# Altium PCB Capstone.PcbDoc
Units mil, origin at the board's own origin, x right, y up, seen from the top; angles counter-clockwise.
Board outline 2565 x 2285 mil, 4 copper layers (Top Layer 1, GND, POWER, Bottom Layer 1), stack 23.756 mil thick; 47 components, 42 nets, 229 pads, 149 vias.
Unrouted connection lines stored in the file: 1.
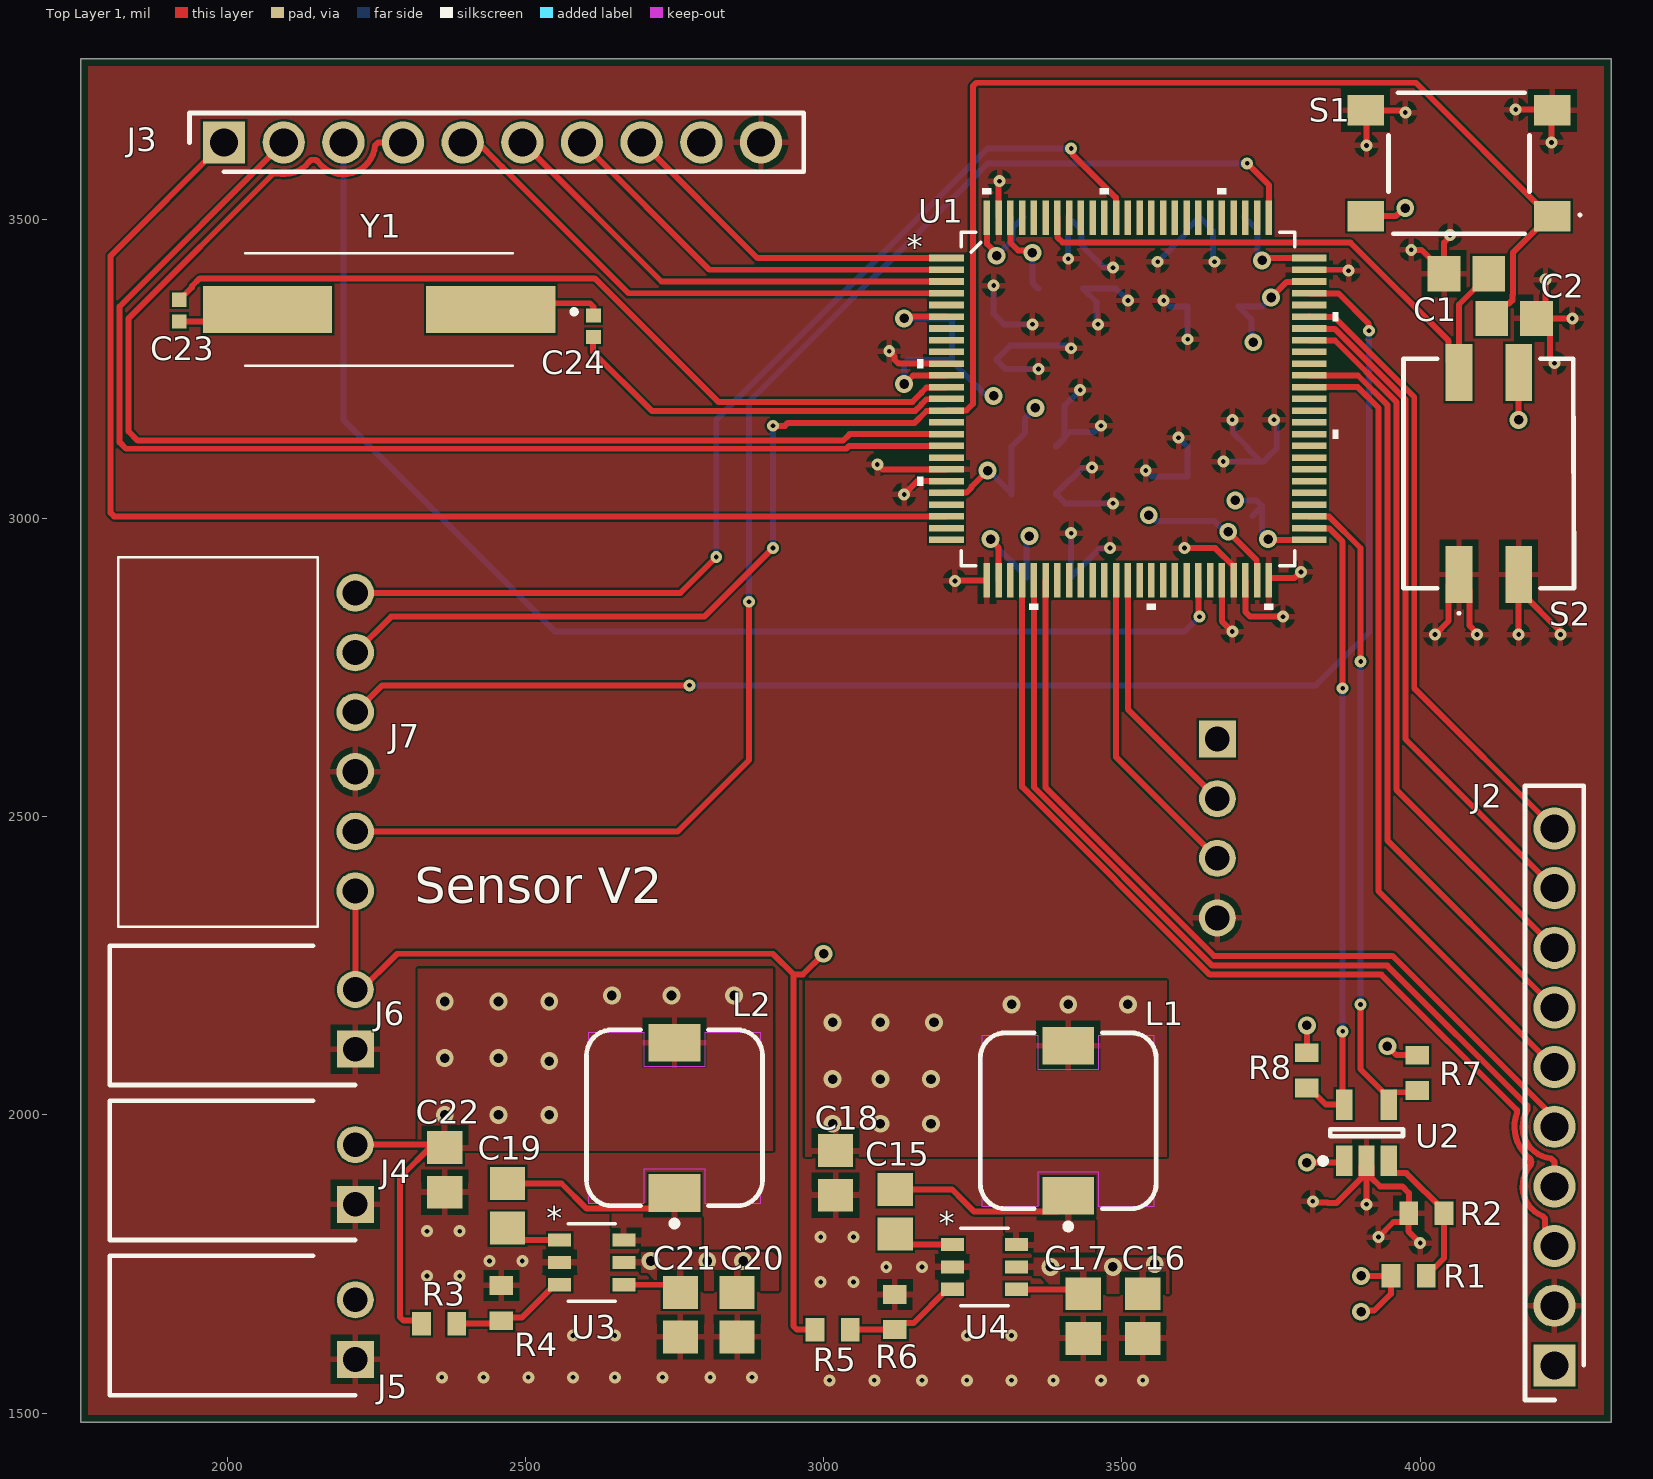
[diagram p0: Top Layer 1 view]
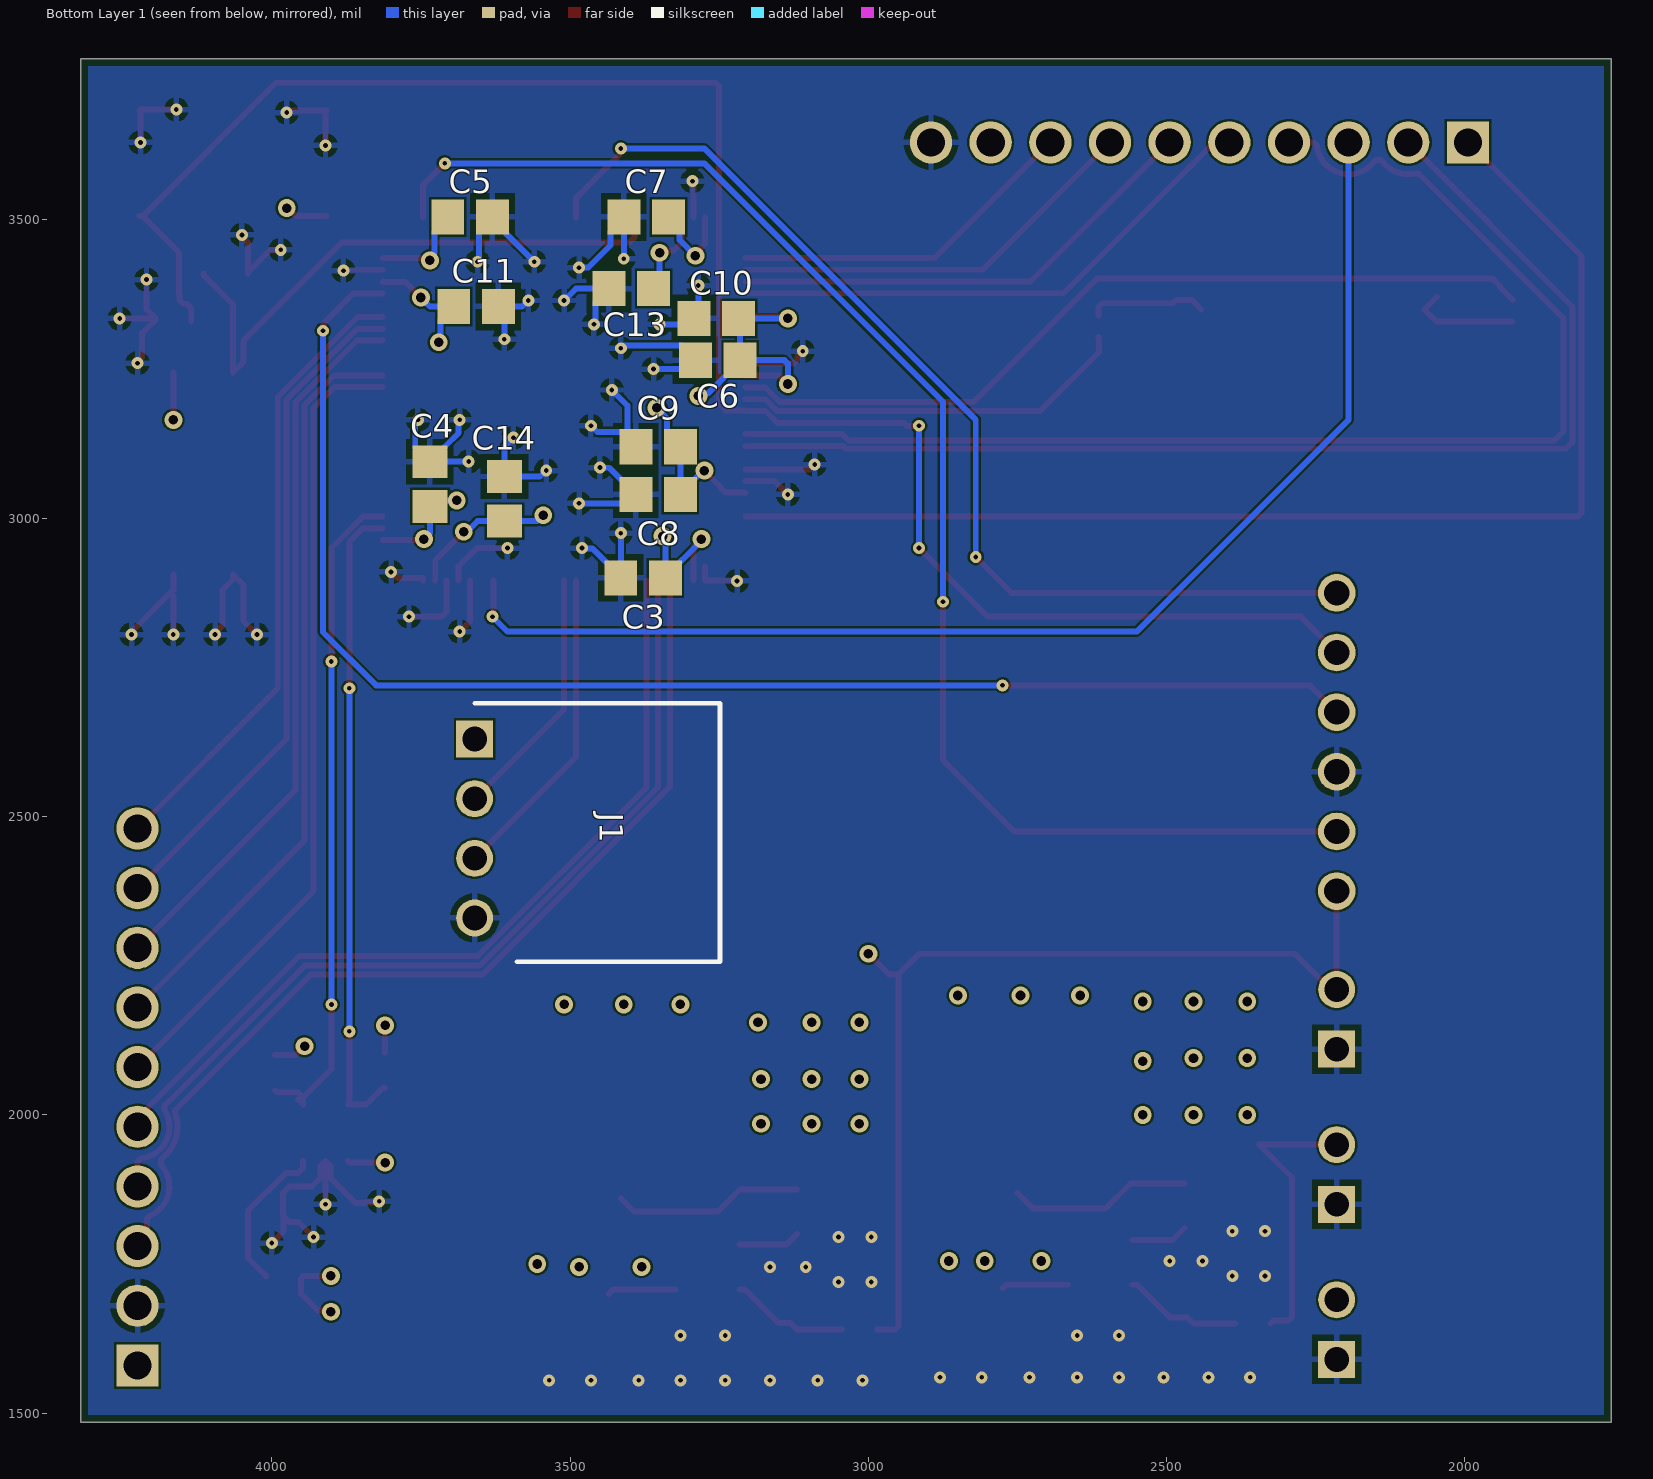
[diagram p1: Bottom Layer 1 view, seen from below]
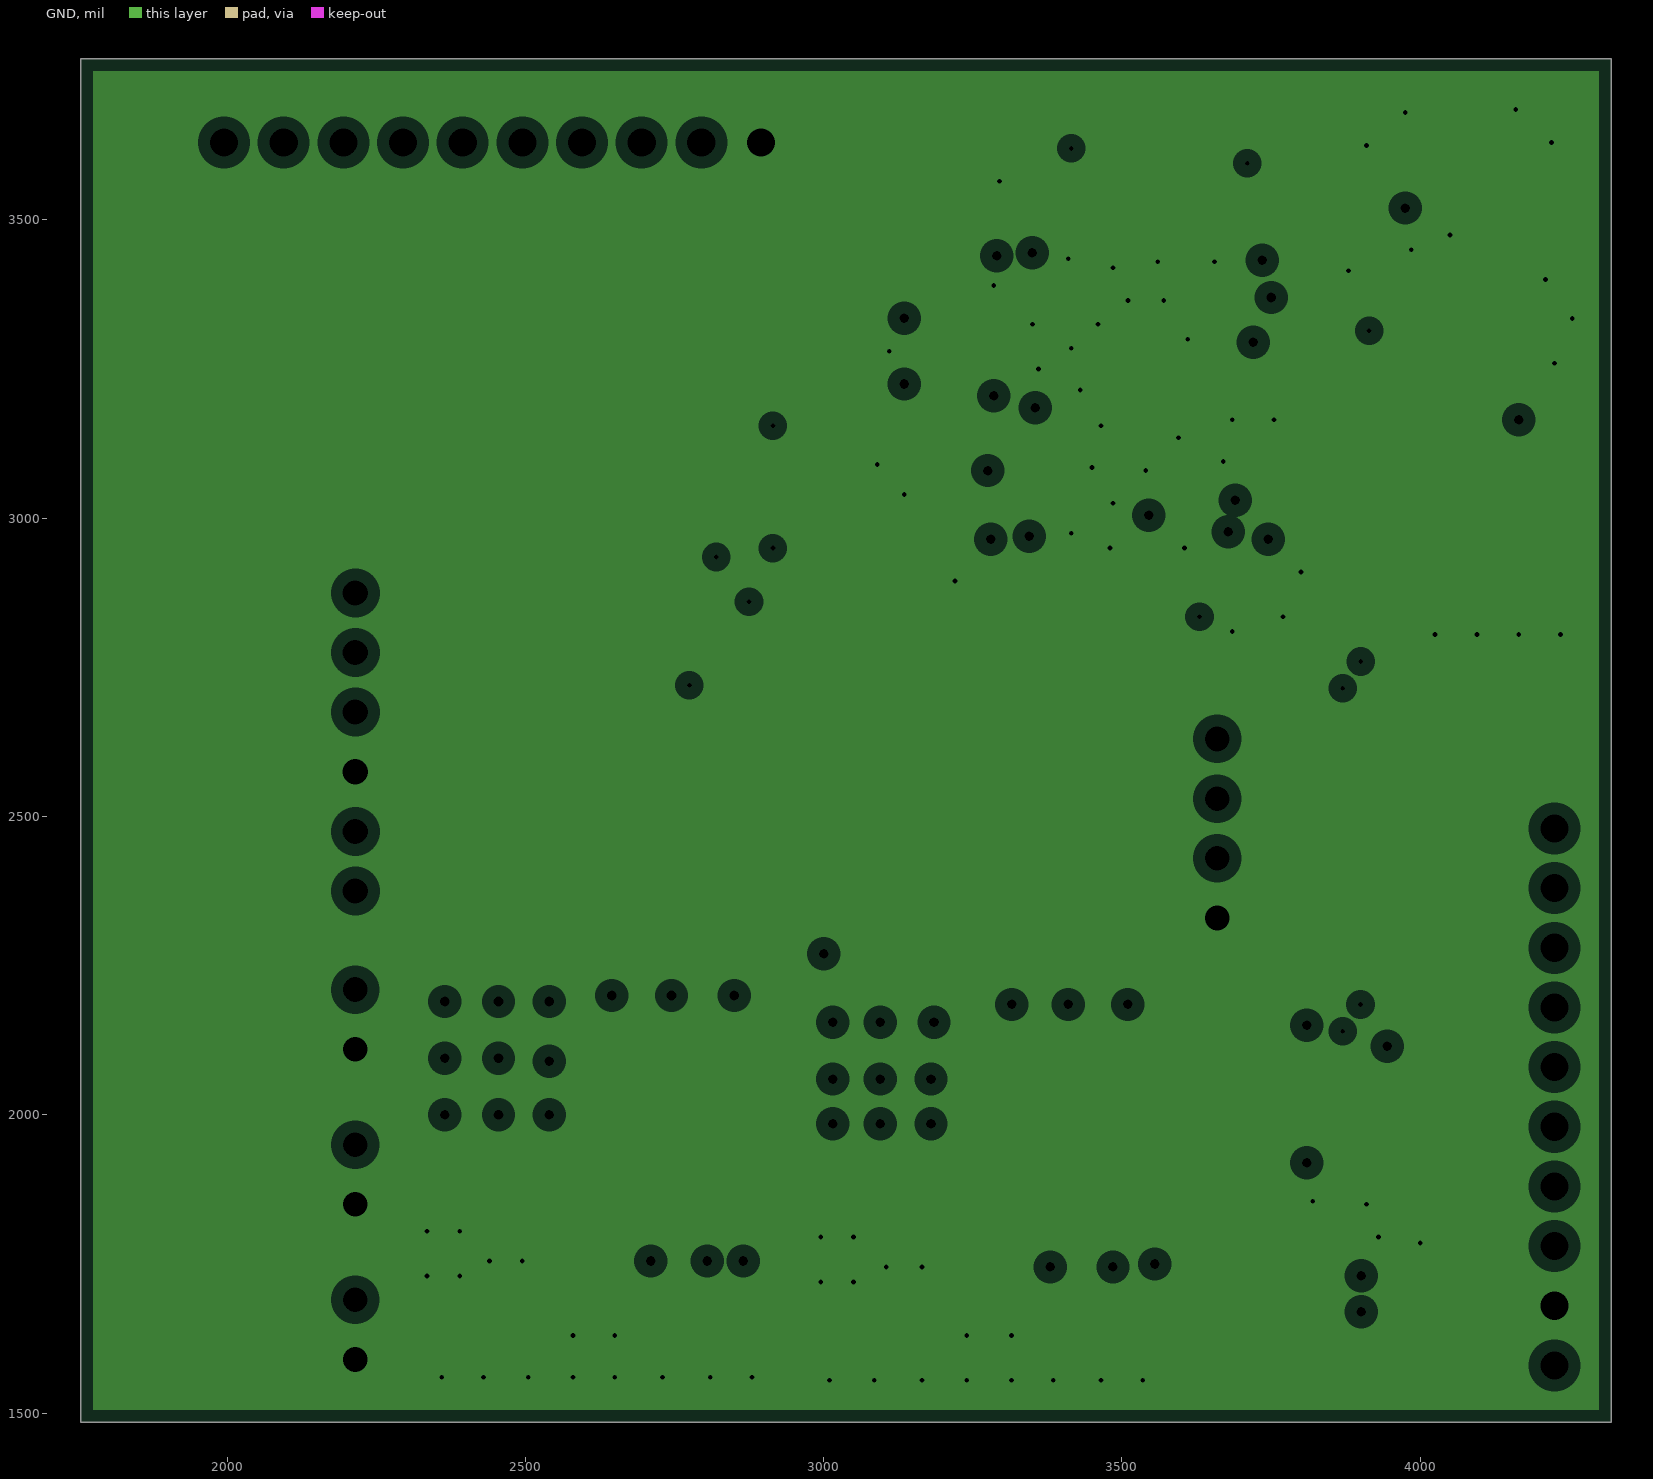
[diagram p2: GND, clearances drawn from the general rule]
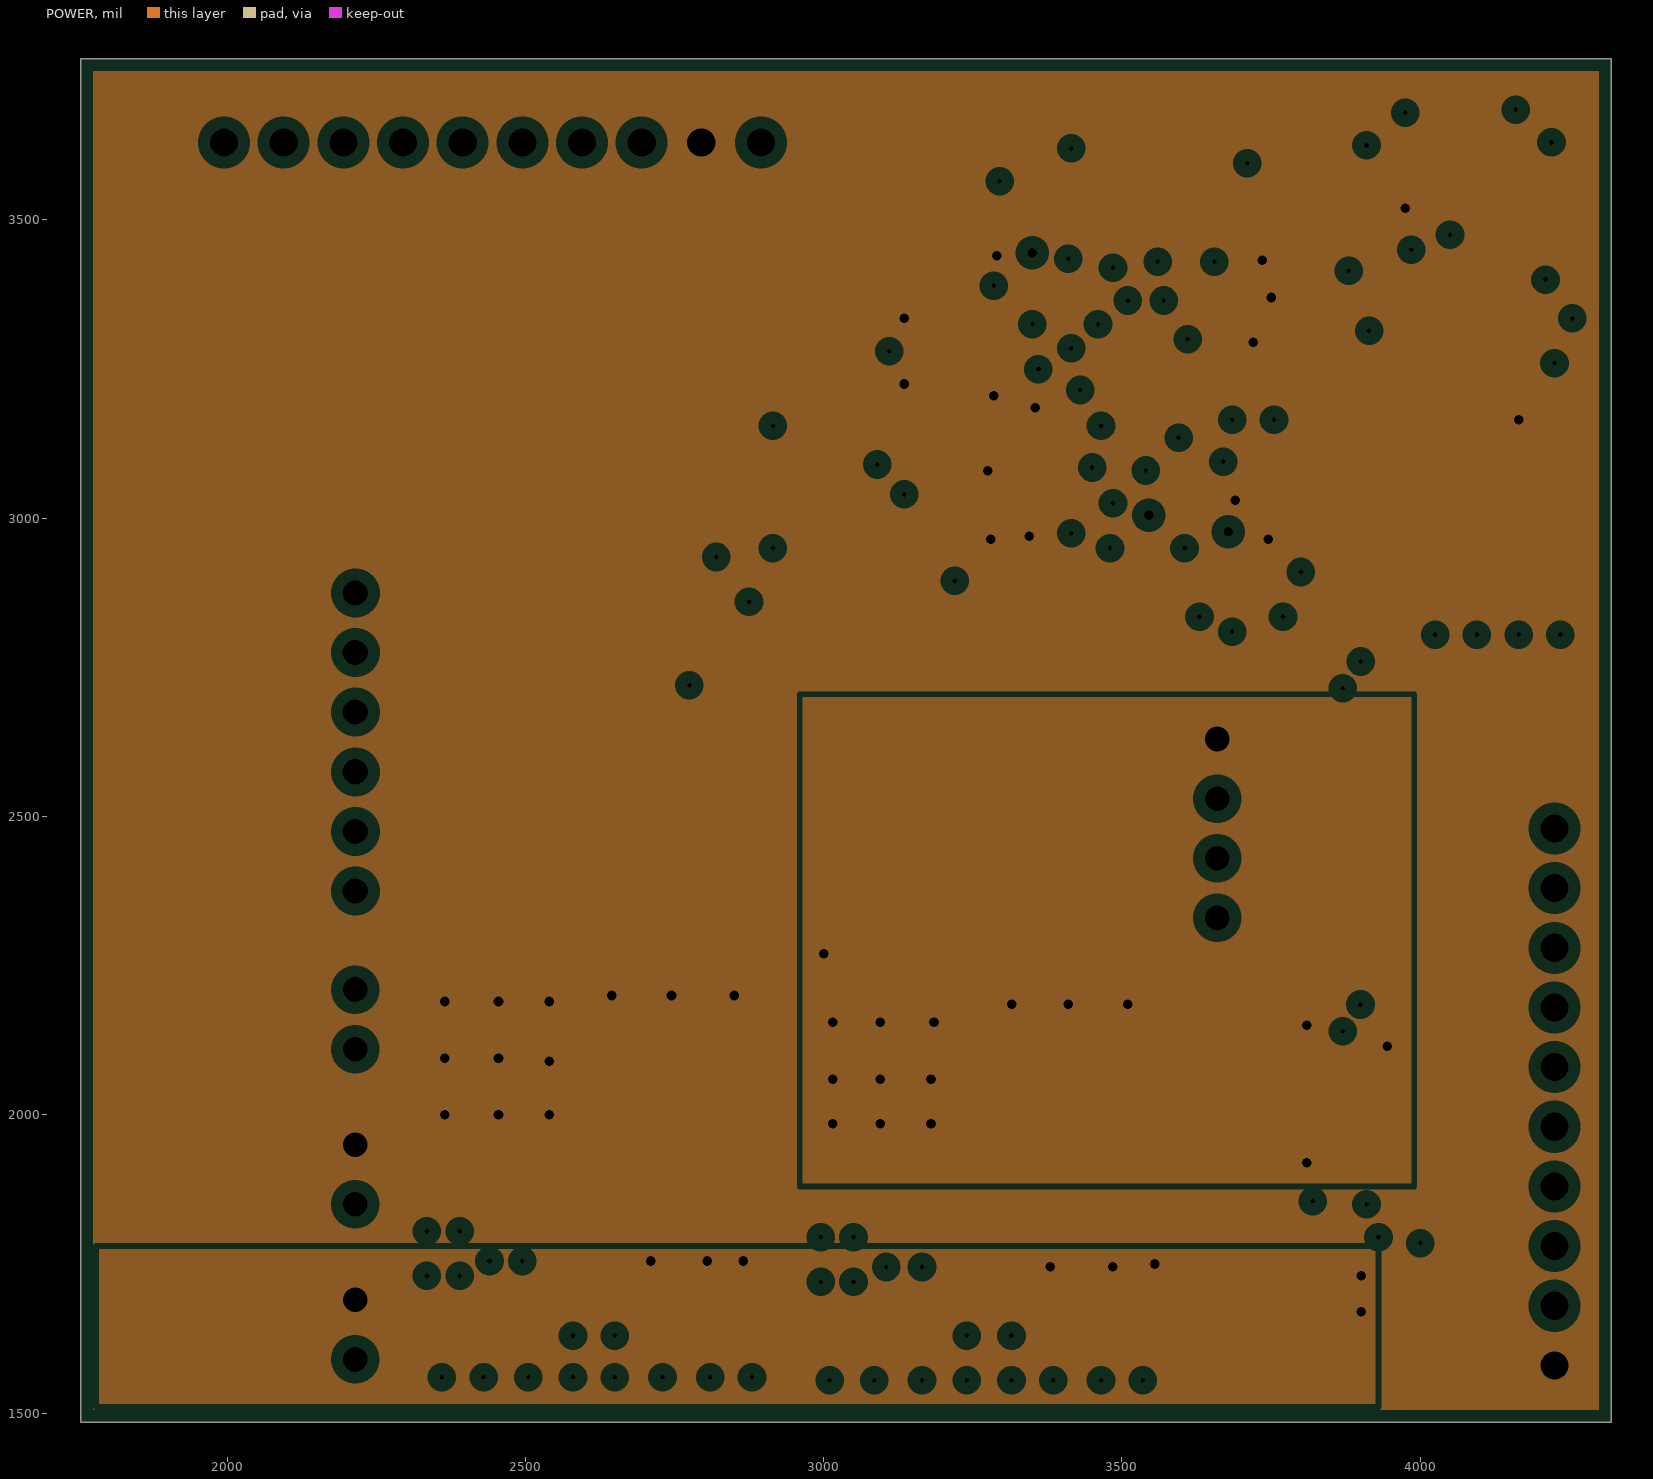
[diagram p3: POWER, clearances drawn from the general rule]
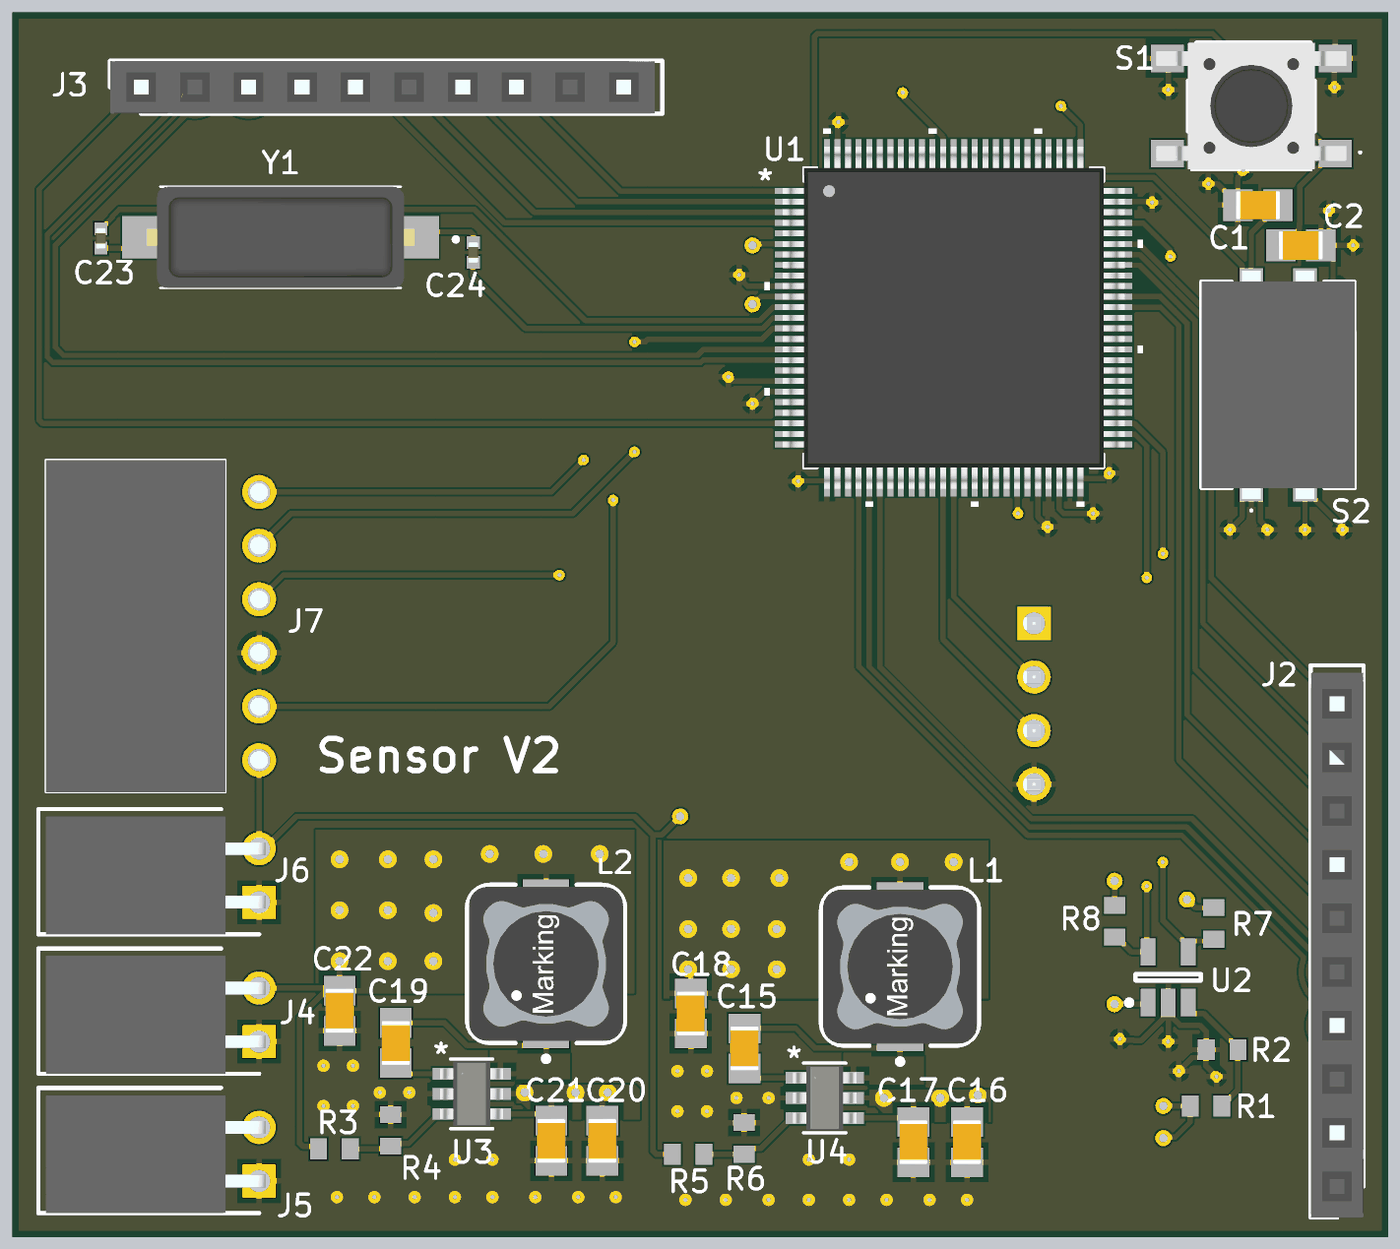
[diagram p4: 3D render of the assembled board from above, using the file's embedded part models]
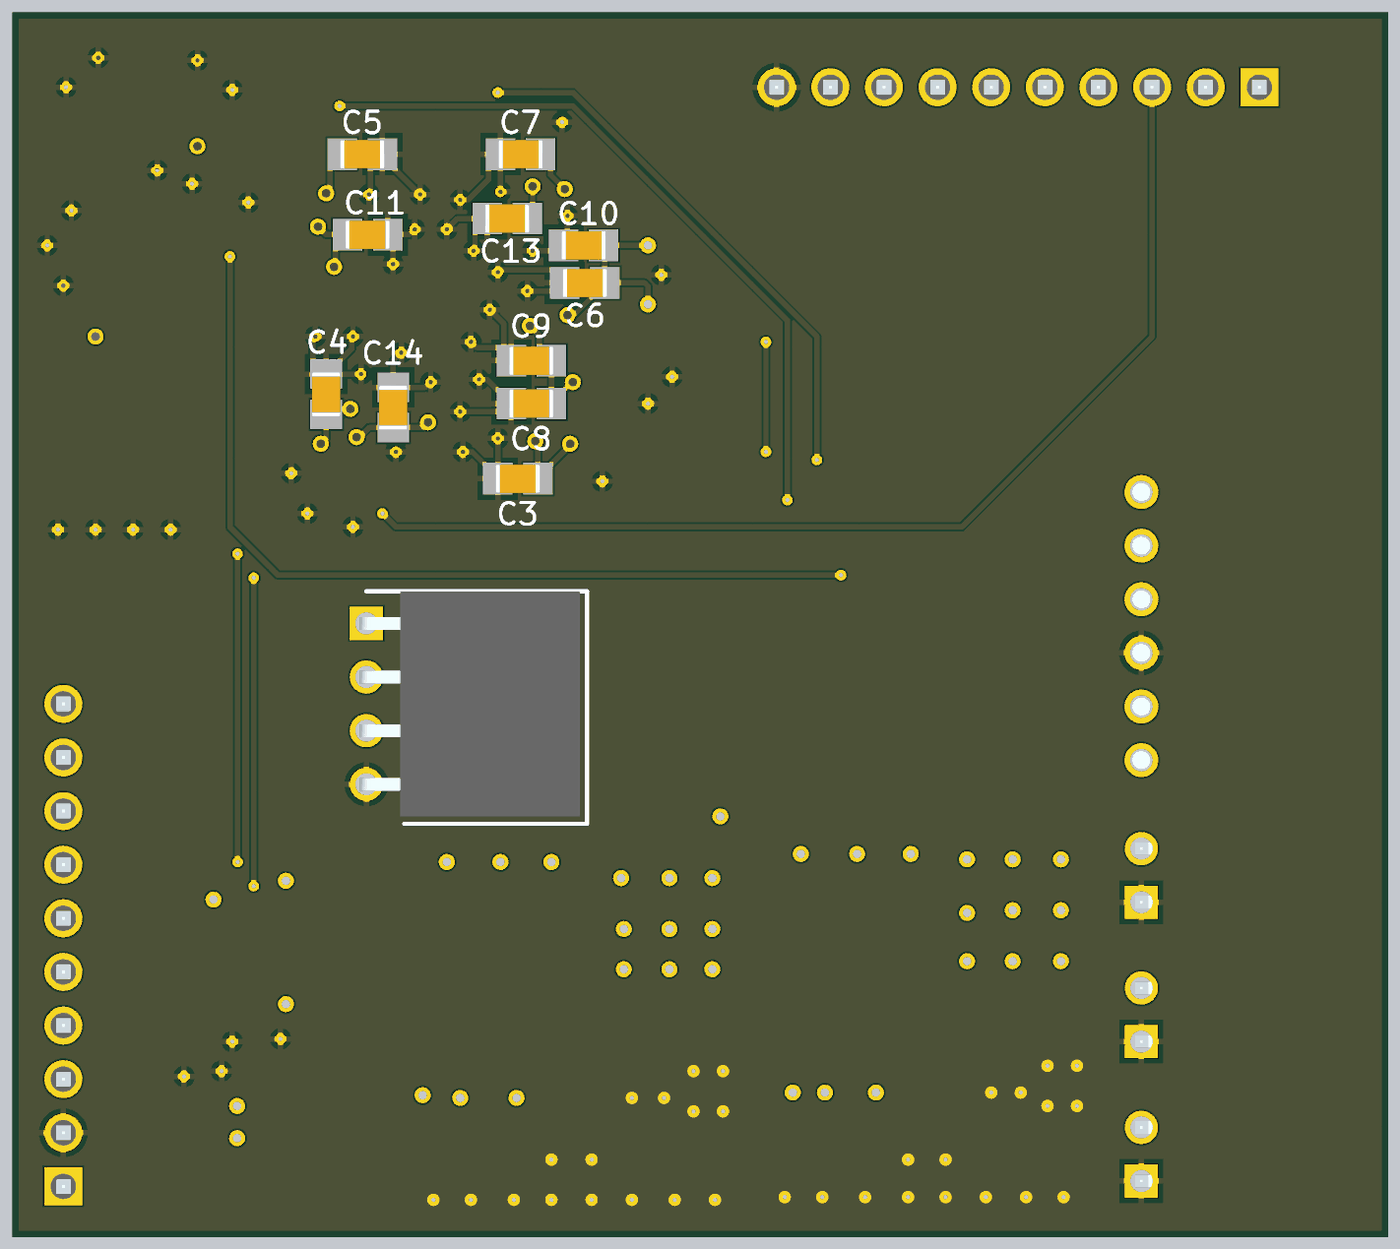
[diagram p5: 3D render of the assembled board from below, using the file's embedded part models]

## Layer stack, top to bottom
Top Solder: solder mask 0.4, Solder Resist, Dk 3.5
Top Layer 1: signal copper 1.378
Dielectric 2: prepreg 2.8, PP-006, Dk 4.1
GND: plane copper 1.4, net GND
Dielectric 1: dielectric 12.6, FR-4, Dk 4.8
POWER: plane copper 1.4, net (Multiple Nets)
Dielectric 3: prepreg 2.8, PP-006, Dk 4.1
Bottom Layer 1: signal copper 1.378
Bottom Solder: solder mask 0.4, Solder Resist, Dk 3.5

## Board outline
1755,1485 1755,3770 4320,3770 4320,1485

## Design rules (kind name [scope] priority, off if disabled: settings)
BoardOutlineClearance [All] p1: gap=11.81 ignorepadtopadclearanceinfootprint=FALSE
Clearance [All] p1: gap=3.5 ignorepadtopadclearanceinfootprint=TRUE except(5: SMDPad-SMDPad; 7.87: Arc-SMDPad Track-SMDPad; 10: Arc-Via Track-Via; 12.99: Arc-THPad Track-THPad; 19.68: THPad-THPad Via-Via)
HoleSize [All] p1: absolutevalues=TRUE maxlimit=248.03 minlimit=5.91 maxpercent=80.000 minpercent=20.000
HoleToHoleClearance [All] p1: gap=19.68 allowstackedmicrovias=TRUE
MinimumAnnularRing [All] p1: minimumring=2
MinimumSolderMaskSliver [All] p1: minsoldermaskwidth=3.94
PlaneClearance [All] p1: clearance=20
PlaneConnect [All] p1: planeconnectstyle=Relief reliefexpansion=20 reliefentries=4 reliefconductorwidth=10 reliefairgap=10
PolygonConnect [All] p1: connectstyle=Relief reliefconductorwidth=10 reliefentries=4 polygonreliefangle="90 Angle" airgapwidth=10
RoutingVias [All] p1: holewidth=8 width=10 viastyle="Through Hole" minholewidth=5.9 minwidth=11.81 maxholewidth=28 maxwidth=50
SilkToSilkClearance [All] p1: silktosilkclearance=1
SilkToSolderMaskClearance [IsPad] p1: minsilkscreentomaskgap=3.94 clearancetoexposedcopper=TRUE
SolderMaskExpansion [All] p1: expansion=1.5 istentingtop=FALSE
SupplyNets "Schematic Supply Nets_1" [InNet('GND')] p1: voltage=0.000
Width [All] p1: maxlimit=10 minlimit=3.5 preferedwidth=10
23 further rules are at their usual default settings.

## Classes and differential pairs
component class "U_Buck Converter 3.3V": C19 C20 C21 C22 L2 R3 R4 U3
component class "U_Buck Converter 5V": C15 C16 C17 C18 L1 R5 R6 U4
component class Capstone: C1 C2 C3 C4 C5 C6 C7 C8 C9 C10 C11 C13 C14 C23 C24 J1 J2 J3 J4 J5 J6 J7 R1 R2 R7 R8 S1 S2 U1 U2 Y1

## Components (designator, comment, footprint, x,y, rotation, side; value= is the part's Value field where it differs from the comment)
C1 "1uF" CAPC2013X135X45LL10T25 4077.4,3410 r0 top
C2 "100nF" CAPC2013X135X45LL10T25 4157.4,3335 r180 top
C3 "100nF" CAPC2013X135X45LL10T25 3377.6,2900 r0 bottom
C4 "100nF" CAPC2013X135X45LL10T25 3735,3057.4 r90 bottom
C5 "100nF" CAPC2013X135X45LL10T25 3667.6,3505 r180 bottom
C6 "100nF" CAPC2013X135X45LL10T25 3252.6,3265 r180 bottom
C7 "100nF" CAPC2013X135X45LL10T25 3372.4,3505 r0 bottom
C8 "100nF" CAPC2013X135X45LL10T25 3352.4,3040 r180 bottom
C9 "1uF" CAPC2013X135X45LL10T25 3352.4,3120 r180 bottom
C10 "10uF" CAPC2013X135X45LL10T25 3255,3335 r180 bottom
C11 "100nF" CAPC2013X135X45LL10T25 3657.6,3355 r0 bottom
C13 "2.2uF" CAPC2013X135X45LL10T25 3397.4,3385 r180 bottom
C14 "2.2uF" CAPC2013X135X45LL10T25 3610,3032.6 r270 bottom
C15 "100nF" CAPC2013X135X45LL10T25 3120,1837.4 r270 top
C16 "10uF" CAPC2013X135X45LL10T25 3535,1662.6 r90 top
C17 "100nF" CAPC2013X135X45LL10T25 3435,1662.6 r90 top
C18 "10uF" CAPC2013X135X45LL10T25 3020,1902.6 r90 top
C19 "100nF" CAPC2013X135X45LL10T25 2470,1847.6 r270 top
C20 "10uF" CAPC2013X135X45LL10T25 2855,1665 r90 top
C21 "100nF" CAPC2013X135X45LL10T25 2760,1665 r90 top
C22 "22uF" CAPC2013X135X45LL10T25 2365,1907.6 r90 top
C23 "CC0402" CAPC1005X55N 1920,3348.11 r270 top
C24 "CC0402" CAPC1005X55N 2614.3,3321.89 r90 top
J1 "PPPC041LGBN-RC" RHDRRA4W60P0X254_1X4_1066X850X274P 3660,2630 r270 bottom
J2 "M20-7821046" RHDR10W70P0X254_1X10_2580X250X865P 4225,1580 r90 top locked
J3 "M20-7821046" RHDR10W70P0X254_1X10_2580X250X865P 1995,3630 r0 top
J4 "PPPC021LGBN-RC" RHDRRA2W60P0X254_1X2_558X850X274P 2215,1850 r90 top
J5 "PPPC021LGBN-RC" RHDRRA2W60P0X254_1X2_558X850X274P 2215,1590 r90 top
J6 "PPPC021LGBN-RC" RHDRRA2W60P0X254_1X2_558X850X274P 2215,2110 r90 top
J7 "PPPC061LGBN-RC" PPPC061LGBNRC 2215,2375 r90 top
L1 "74477710" WE-PD_7345 3410,1990 r90 top
L2 "74477710" WE-PD_7345 2750,1995 r90 top
R1 "1k" RESC1608X55X25ML10T15 3980.47,1730 r180 top
R2 "1k" RESC1608X55X25ML10T15 4010.47,1835 r180 top
R3 "69.8k" RESC1608X55X25ML10T15 2355.47,1650 r180 top
R4 "22.1k" RESC1608X55X25ML10T15 2460,1684.53 r270 top
R5 "115k" RESC1608X55X25ML10T15 3014.97,1640 r180 top
R6 "22.1k" RESC1608X55X25ML10T15 3119.5,1669.53 r270 top
R7 "2k" RESC1608X55X25ML10T15 3995,2070.47 r270 top
R8 "2k" RESC1608X55X25ML10T15 3810,2074.53 r270 top
S1 "PTS645SK43SMTR92LFS" PTS645SK43SMTR92LFS 4065,3595 r180 top
S2 "204-211STR" 204211STR 4115,3075 r0 top
U1 "STM32U5A5VJT6Q" LQFP-100_STM 3510,3200 r0 top
U2 "MCP3021A5T-E/OT" SOT-23-OT5_M 3910,1970 r90 top
U3 "PLMR54410DBVR" U_SOT-23_TEX 2611.25,1752.6 r0 top
U4 "PLMR54410DBVR" U_SOT-23_TEX 3269.5,1745 r0 top
Y1 "9C-8.000MEEJ-T" 9C7680MBBKT 2255,3350 r180 top

## Footprints (in the part's own frame and the unit in brackets; to place one, negate y for a bottom-side part, rotate by r counter-clockwise, add the part's x,y. Pads: shape width x height; smd on the part's side, far side on the other; paste and mask are expansions set on the pad)
9C7680MBBKT [mm]
  rect 5.5x2 smd: 1(-4.75,0) 2(4.75,0)
  silkscreen extent -8.4,-2.4 5.7,2.4, body extent -6.35,-2.4 6.35,2.4, height 3.8
204211STR [mm]
  rect 1.13x2.44 smd: A1(-1.27,-4.3) A2(1.27,-4.3) B1(-1.27,4.3) B2(1.27,4.3)
  silkscreen extent -3.63,-6 3.63,4.89, body extent -3.63,-5.41 3.63,5.41, height 10.46
CAPC1005X55N [mm]
  rect 0.6x0.62 smd: 1(-0.46,0) 2(0.46,0)
  body extent -0.5,-0.25 0.5,0.25, height 0.55
CAPC2013X135X45LL10T25 [mm] "Chip Capacitor, 2-Leads, Body 2.10x1.35mm, IPC High Density"
  rect 1.4x1.5 smd: 1(-0.95,0) 2(0.95,0)
  body extent -1.05,-0.67 1.05,0.67, height 1.35
LQFP-100_STM [mil]
  rect 58x11 smd paste+0 mask+0: 1(-304,236.22) 2(-304,216.54) 3(-304,196.85) 4(-304,177.17) 5(-304,157.48) 6(-304,137.8) 7(-304,118.11) 8(-304,98.43) 9(-304,78.74) 10(-304,59.06) 11(-304,39.37) 12(-304,19.69) 13(-304,0) 14(-304,-19.68) 15(-304,-39.37) 16(-304,-59.06) 17(-304,-78.74) 18(-304,-98.43) 19(-304,-118.11) 20(-304,-137.8) 21(-304,-157.48) 22(-304,-177.17) 23(-304,-196.85) 24(-304,-216.54) 25(-304,-236.22) 51(304,-236.22) 52(304,-216.54) 53(304,-196.85) 54(304,-177.17) 55(304,-157.48) 56(304,-137.8) 57(304,-118.11) 58(304,-98.43) 59(304,-78.74) 60(304,-59.06) 61(304,-39.37) 62(304,-19.68) 63(304,0) 64(304,19.68) 65(304,39.37) 66(304,59.06) 67(304,78.74) 68(304,98.43) 69(304,118.11) 70(304,137.8) 71(304,157.48) 72(304,177.17) 73(304,196.85) 74(304,216.54) 75(304,236.22)
  rect 11x58 smd paste+0 mask+0: 26(-236.22,-304) 27(-216.54,-304) 28(-196.85,-304) 29(-177.17,-304) 30(-157.48,-304) 31(-137.8,-304) 32(-118.11,-304) 33(-98.43,-304) 34(-78.74,-304) 35(-59.06,-304) 36(-39.37,-304) 37(-19.68,-304) 38(0,-304) 39(19.68,-304) 40(39.37,-304) 41(59.06,-304) 42(78.74,-304) 43(98.43,-304) 44(118.11,-304) 45(137.8,-304) 46(157.48,-304) 47(177.17,-304) 48(196.85,-304) 49(216.54,-304) 50(236.22,-304) 76(236.22,304) 77(216.54,304) 78(196.85,304) 79(177.17,304) 80(157.48,304) 81(137.8,304) 82(118.11,304) 83(98.43,304) 84(78.74,304) 85(59.06,304) 86(39.37,304) 87(19.68,304) 88(0,304) 89(-19.68,304) 90(-39.37,304) 91(-59.06,304) 92(-78.74,304) 93(-98.43,304) 94(-118.11,304) 95(-137.8,304) 96(-157.48,304) 97(-177.17,304) 98(-196.85,304) 99(-216.54,304) 100(-236.22,304)
  silkscreen extent -353,-353 353,353, body extent -319,-319 319,319, height 63
PPPC061LGBNRC [mm]
  round 1.605 hole 1.07: 1(0,0) 2(2.54,0) 3(5.08,0) 4(7.62,0) 5(10.16,0) 6(12.7,0)
  silkscreen extent -1.52,1.6 14.22,10.1, body extent -1.52,-0.43 14.22,10.1, height 2.84
PTS645SK43SMTR92LFS [mm]
  rect 1.55x1.3 smd: 1(-3.975,2.25) 2(3.975,2.25) 3(-3.975,-2.25) 4(3.975,-2.25)
  silkscreen extent -5.2,-3 3,3, body extent -4.5,-3 4.5,3, height 4.3
RESC1608X55X25ML10T15 [mm] "Chip Resistor, 2-Leads, Body 1.60x0.80mm, IPC Low Density"
  rect 0.8x1 smd: 1(-0.75,0) 2(0.75,0)
  body extent -0.85,-0.45 0.85,0.45, height 0.55
RHDR10W70P0X254_1X10_2580X250X865P [mm]
  rect 1.8x1.8 hole 1.2: 1(0,0)
  round 1.8 hole 1.2: 2(2.54,0) 3(5.08,0) 4(7.62,0) 5(10.16,0) 6(12.7,0) 7(15.24,0) 8(17.78,0) 9(20.32,0) 10(22.86,0)
  silkscreen extent -1.47,-1.25 24.68,1.25, body extent -1.47,-1.25 24.33,1.25, height 8.65
RHDRRA2W60P0X254_1X2_558X850X274P [mm]
  rect 1.575x1.575 hole 1.05: 1(0,0)
  round 1.575 hole 1.05: 2(2.54,0)
  silkscreen extent -1.52,0 4.41,10.45, body extent -1.52,-0.3 4.06,10.1, height 2.74
RHDRRA4W60P0X254_1X4_1066X850X274P [mm]
  rect 1.575x1.575 hole 1.05: 1(0,0)
  round 1.575 hole 1.05: 2(2.54,0) 3(5.08,0) 4(7.62,0)
  silkscreen extent -1.52,0 9.49,10.45, body extent -1.52,-0.3 9.14,10.1, height 2.74
SOT-23-OT5_M [mm] "SOT23, 5-Leads, Body 2.9x1.7mm, Pitch 0.95mm, Lead Span 2.8mm, IPC Low Density"
  rect 1.3x0.7 smd: 1(-1.2,0.95) 2(-1.2,0) 3(-1.2,-0.95) 4(1.2,-0.95) 5(1.2,0.95)
  silkscreen extent -1.32,-1.55 0.15,1.97, body extent -0.9,-1.55 0.9,1.55, height 1.45
U_SOT-23_TEX [mil]
  rect 38.5x22 smd paste+0 mask+0: 1(-53.75,37.4) 2(-53.75,0) 3(-53.75,-37.4) 4(53.75,-37.4) 5(53.75,0) 6(53.75,37.4)
  silkscreen extent -40,-65 40,65, body extent -59,-60 59,60, height 57
WE-PD_7345 [mm] "SMT Shielded Power Inductor, 2-leads, body 7.3x7.3mm"
  rect 1.6x2.2 smd: 1(-3.2,0) 2(3.2,0)
  Top Layer 1 keep-out region: -3.65,-3.65 -3.65,-1.3 -2.2,-1.3 -2.2,1.3 -3.65,1.3 -3.65,3.65 3.65,3.65 3.65,1.3 2.2,1.3 2.2,-1.3 3.65,-1.3 3.65,-3.65
  silkscreen extent -4.62,-3.75 3.75,3.75, body extent -3.65,-3.65 3.65,3.65, height 3.91

## Part data
C1 C2 C3 C4 C5 C6 C7 C8 C9 C10 C11 C13 C14 C15 C16 C17 C18 C19 C20 C21 C22: library part CMP-1662-00015-2, "Chip Capacitor, 4.7 uF, +/- 10%, 16 V, -55 to 85 degC, 0805 (2012 Metric), RoHS, Tape and Reel", Capacitance="4.7 uF", Case Code (Imperial)=0805, Case Code (Metric)=2012, Max Operating Temperature="85 degC", Min Operating Temperature="-55 degC", Package Quantity=3000, PartNumber=GRM21BR61C475KA88L, Tolerance=10%, Type (Capacitors)=X5R, Voltage Rating="16 V", Case\/Package=0805, ComponentLink1Description="Manufacturer URL", ComponentLink1URL=http://www.murata.com/, ComponentLink2Description=Datasheet, ComponentLink2URL=http://search.murata.co.jp/Ceramy/image/img/A01X/G101/ENG/GRM21BR61C475KA88-01.pdf, DatasheetVersion=03/2016, Height="1.25 mm", Length="2 mm", Mount="Surface Mount", Mounting Technology="Surface Mount", PackageDescription="2-Pin Surface Mount Device, Body 2 x 1.25 mm", PackageReference=0805, Packaging="Tape and Reel", Pins=2, Radiation Hardening=No, REACH SVHC="No SVHC", RoHSCompliant=true, Voltage Rating (DC)="16 V", Width="1.25 mm"
C23 C24: library part CC0402FRNPO9BN180, "Capacitor", Manufacturer_Name=YAGEO, Datasheet Link=https://www.yageo.com/upload/media/product/productsearch/datasheet/mlcc/UPY-GP_NP0_16V-to-50V_18.pdf, Height=0.55mm, Manufacturer_Part_Number=CC0402FRNPO9BN180
J1 J4 J5 J6 J7: "Connector", Manufacturer_Name=Sullins, Height=2.74mm
  J1: Datasheet Link=https://drawings-pdf.s3.amazonaws.com/10493.pdf, Manufacturer_Part_Number=PPPC041LGBN-RC
  J4 J5 J6: Datasheet Link=http://www.sullinscorp.com/drawings/78_P(N)PxCxx1LGBN-RC,_10493-G.pdf, Manufacturer_Part_Number=PPPC021LGBN-RC
  J7: Datasheet Link=https://drawings-pdf.s3.amazonaws.com/10493.pdf, Manufacturer_Part_Number=PPPC061LGBN-RC
J2 J3: "Connector", Manufacturer_Name=Harwin, Mouser Part Number=855-M20-7821046, Datasheet Link=https://cdn.harwin.com/pdfs/M20-782.pdf, Height=8.65mm, Manufacturer_Part_Number=M20-7821046, Mouser Price/Stock=https://www.mouser.co.uk/ProductDetail/Harwin/M20-7821046?qs=Jph8NoUxIfXTsFl0wvOA6g%3D%3D
L1 L2: library part CMP-0227-00113-2, Ambient Temperature Range High=85°C, Ambient Temperature Range Low=-40°C, Case/Package=Nonstandard, Current Rating=2A, DC Resistance (DCR)=45mΩ, Inductance=10µH, Inductance Tolerance=20%, Max Operating Temperature=125°C, Saturation Current=2.6A, Self Resonant Frequency=23MHz, Test Frequency=1kHz, Composition=Wirewound, Core Material=Ferrite, Depth=7.3mm, Height=4.5mm, Height - Seated (Max)=4.4958mm, Lead Free="Lead Free", Lead Pitch=4mm, Length=7.3mm, Max DC Current=2A, Min Operating Temperature=-40°C, Mount="Surface Mount", NexarPartId=11853718, Number of Pins=2, Packaging="Cut Tape (CT)", RoHS=Compliant, Shielding=Shielded, Termination=SMD/SMT, Tolerance=20%, Width=7.3mm
R1 R2 R3 R4 R5 R6 R7 R8: library part CMP-2100-03667-1, "Chip Resistor, 0 Ohm, +/- 5%, 0.1 W, -55 to 155 degC, 0603 (1608 Metric), RoHS, Tape and Reel", Case Code (Imperial)=0603, Case Code (Metric)=1608, Manufacturer=Yageo, Max Operating Temperature=155degC, Min Operating Temperature=-55degC, Package Description="2-Pin Surface Mount Device, Body 1.6 x 0.8 mm", Package Quantity=5000, Power Rating=100mW, Resistance=0mOhm, Temperature Coefficient=200ppm/degreesC, Tolerance=5%, Voltage Rating=50V, Case/Package=0603, Composition=ThickFilm, Contact Plating=Tin, Datasheet URL=http://www.yageo.com/NewPortal/yageodocoutput?fileName=/pdf/R-Chip/PYu-RC_Group_51_RoHS_L_5.pdf, Datasheet Version="Rev. 5, 10/2016", Depth=0.8mm, Height=0.45mm, Lead Free=LeadFree, Length=1.6mm, Manufacturer URL=http://www.yageo.com/, Military Standard=Not, Number of Pins=2, Package Reference=0603, Packaging=TapeandReel, Radiation Hardening=No, REACH SVHC=NoSVHC, RoHSCompliant=true, Termination=SMD/SMT, Voltage Rating (DC)=50V, Width=0.8mm
S1: "Switch", Manufacturer_Name="C & K COMPONENTS", Mouser Part Number=611-PTS645SK43SMTR92, Arrow Part Number=PTS645SK43SMTR92LFS, Arrow Price/Stock=https://www.arrow.com/en/products/pts645sk43smtr92lfs/ck?region=nac, Datasheet Link=https://www.ckswitches.com/media/1471/pts645.pdf, Height=4.4mm, Manufacturer_Part_Number=PTS645SK43SMTR92LFS, Mouser Price/Stock=https://www.mouser.co.uk/ProductDetail/CK/PTS645SK43SMTR92LFS?qs=UxeAxwACbqlWa%2Fy4o%252BzfBw%3D%3D
S2: "Switch", Manufacturer_Name=CTS, Mouser Part Number=774-204-211STR, Arrow Part Number=204-211STR, Arrow Price/Stock=https://www.arrow.com/en/products/204-211str/cts, Datasheet Link=https://www.ctscorp.com/wp-content/uploads/204.pdf, Height=10.36mm, Manufacturer_Part_Number=204-211STR, Mouser Price/Stock=https://www.mouser.co.uk/ProductDetail/CTS-Electronic-Components/204-211STR?qs=quytmY96oUgb3oIvtnAfmw%3D%3D
U1: "No Description Available", Mfr_Name=STMicroelectronics, RefDes=RefDes, Type=Type
U2: library part CMP-0188-00726-2, "Low Power 10-Bit A/D Converter With I2C Interface, 5-Pin SOT-23, Extended Temperature, Tape and Reel", Code_IPC=SOT23-5, ComponentLink1Description="Manufacturer URL", ComponentLink1URL=http://www.microchip.com/, ComponentLink2Description=Datasheet, ComponentLink2URL=http://ww1.microchip.com/downloads/en/DeviceDoc/21805a.pdf, ComponentLink3Description="Package Specification", ComponentLink3URL=http://www.microchip.com/stellent/groups/techpub_sg/documents/packagingspec/en012702.pdf, DatasheetVersion="revA, May-2003", PackageDescription="5-Lead Plastic Small Outline Transistor (OT) [SOT-23]", PackageReference=SOT-23-OT5, PackageVersion="revBB, Aug-2009", RevisionNote="URLs added."
U3 U4: "No Description Available", Mfr_Name="Texas Instruments", RefDes=RefDes, Type=Type
Y1: "Crystal or Oscillator", Manufacturer_Name="TXC CORPORATION", Mouser Part Number=717-9C-8.000MEEJ-T, Arrow Part Number=9C-8.000MEEJ-T, Arrow Price/Stock=https://www.arrow.com/en/products/9c-8.000meej-t/txc-corporation?region=nac, Datasheet Link=http://www.txccrystal.com/images/pdf/9c-accuracy.pdf, Height=3.8mm, Manufacturer_Part_Number=9C-8.000MEEJ-T, Mouser Price/Stock=https://www.mouser.co.uk/ProductDetail/TXC-Corporation/9C-8000MEEJ-T?qs=65dIHZNch5tI7l8164Zoqw%3D%3D

## Via types
v1: diameter 20, hole 8, Top Layer 1 to Bottom Layer 1, 95 vias
v2: diameter 30, hole 16, Top Layer 1 to Bottom Layer 1, 54 vias

## Nets (pads, with @x,y where several pads share a name; then routed paths per layer and width w, separated by ;. In a path a pad name is that pad's centre, name@x,y a point inside that pad or via, vN(x,y) a via of type N, cw(c..) or ccw(c..) an arc to the next point about the centre after c; other vN are vias at no path point)
3.3V: C3.1 C4.1 C5.1 C6.2 C7.1 C8.2 C9.2 C10.2 C11.2 C22.2 J2.1 J3.9 J4.2 L2.2 R3.2 S1.2 S2.B2 U1.6 U1.11 U1.21 U1.27 U1.51 U1.73 U1.75 U1.100 | length 2418.4
  Top Layer 1 w10: J4.2 2345,1950 2290,1895 2290,1660.86 2295.86,1655 2320.94,1655 R3.2 ; v2(3135,3225) 3135.49,3225 3149.86,3239.37 U1.11 ; v2(3135,3335) 3137.71,3335 3140.5,3337.8 U1.6 ; U1.21 3206.5,3043.02 3239.52,3043.02 3247.87,3051.37 3247.87,3052.87 v2(3275,3080) ; U1.100 3273.78,3460 3290,3443.78 v2(3290,3440) ; v2(3280,2965) 3280,2964.51 3293.46,2951.05 U1.27 ; v2(3735,3432.13) 3740.41,3432.13 3744.51,3436.22 U1.75 ; v2(3745,2965) 3745.49,2965 3746.71,2963.78 U1.51 ; v2@3750.1,3370.1 3776.35,3396.35 3813.5,3396.35 U1.73 ; S1.2 3958.71,3506.42 3972.29,3520 v2(3975,3520) ; v2(4165,3165) S2.B2
  Bottom Layer 1 w10: v2(3135,3225) 3135,3259.14 3140.86,3265 C6.2 ; v2(3135,3335) C10.2 3215.2,3332.6 C6.2 ; v2(3275,3080) 3276.97,3080 3315,3041.97 C8.2 3315,3045 C9.2 3337.56,3142.56 3337.56,3167.56 v2(3355,3185) ; v2(3280,2965) 3280.35,2964.65 3280.35,2961.82 C3.1@3340.2,2901.97 ; v2(3285,3205) 3281.17,3208.83 3269.4,3208.83 3215.2,3263.03 C6.2 ; v2(3290,3440) 3316.33,3466.33 3316.33,3486.33 C7.1 ; C3.1 C3.1@3340.2,2901.97 ; v2(3345,2970) 3345,2969.51 3340.2,2964.71 C3.1@3340.2,2901.97 ; v2@3687.29,3030 3725,3030 C4.1 ; C5.1 3727.56,3482.44 3727.56,3444.98 3735,3437.54 v2(3735,3432.13) ; C4.1@3719.16,3004.16 C4.1 ; v2(3720.2,3295) 3720.2,3295.49 3717.56,3298.13 3717.56,3332.44 C11.2 3735.2,3355 v2(3750.2,3370) ; v2(3745,2965) 3745,2965.49 3735,2975.49 C4.1
  other v2: 2365,2000 2455,2000 2540,2000 2540,2090 2365,2095 2455,2095 2365,2190 2455,2190 2540,2190 2645,2200 2745,2200 2850,2200 3690,3030
5V: C18.2 J1.1 J6.2 J7.1 L1.2 R5.2 R7.1 R8.1 U2.1 | length 1794.4
  Top Layer 1 w10: J6.2 J7.1 ; J6.2@2220,2205 2285,2270 2295,2270 2915,2270 2949.5,2235.5 ; R5.2 2955.36,1640 2949.5,1645.86 2949.5,2235.5 ; v2(3000,2270) 2965.5,2235.5 2949.5,2235.5 ; v2(3810,1920) 3869.84,1920 U2.1 ; R8.1 v2(3810,2150) ; v2(3945,2115) 3945.31,2115 3960.31,2100 R7.1
  other v2: 3015,1985 3095,1985 3180,1985 3015,2060 3095,2060 3180,2060 3015,2155 3095,2155 3185,2155 3315,2185 3410,2185 3510,2185
CB3.3: C19.2 U3.1 | length 95.9
  Top Layer 1 w10: C19.2 2490.2,1790 U3.1
CB5: C15.2 U4.1 | length 103
  Top Layer 1 w10: C15.2 3137.6,1782.4 U4.1
DEBUG_SWCLK: J7.2 U1.76 | length 2416.6
  Top Layer 1 w10: J7.2 2755.36,2475 2875,2594.64 v1(2875,2860) ; v1(3710,3595) 3746.22,3558.78 U1.76
  Bottom Layer 1 w10: v1(2875,2860) 2875,3195 3275,3595 v1(3710,3595)
DEBUG_SWDIO: J7.4 U1.72 | length 2393
  Top Layer 1 w10: J7.4 2260,2720 v1(2775,2720) ; U1.72 3814.5,3376.67 3863.33,3376.67 3913.17,3326.83 3913.17,3315.53 v1(3914.35,3314.35)
  Bottom Layer 1 w10: v1(2775,2720) 3825,2720 3914.35,2809.35 v1(3914.35,3314.35)
DEBUG_SWO: J7.6 U1.89 | length 1790.5
  Top Layer 1 w10: J7.6 2760,2875 v1(2820,2935) ; v1(3415,3620) 3416.91,3618.09 3416.91,3610.42 3489.82,3537.52 3489.82,3504.5 U1.89
  Bottom Layer 1 w10: v1(2820,2935) 2820,3165 3275,3620 v1(3415,3620)
DISP_CARD_CS: J3.6 U1.3 | length 807.6
  Top Layer 1 w10: J3.6 2728.15,3396.85 U1.3
DISP_DC: J3.7 U1.2 | length 699.4
  Top Layer 1 w10: J3.7 2808.46,3416.54 U1.2
DISP_LITE: J3.1 U1.23 | length 2103.1
  Top Layer 1 w10: J3.1 1805,3440 1805,3009.01 1810.86,3003.15 U1.23
DISP_MISO: J3.2 U1.17 | length 2009.2
  Top Layer 1 w10: J3.2 1820,3355 1820,3127.12 1830.62,3116.5 3038.15,3116.5 3042.91,3121.26 U1.17
DISP_MOSI: J3.4 U1.16 | length 2175
  Top Layer 1 w10: J3.4 2253.49,3630 2250.56,3627.07 2248.16,3624.67 cw(c2195,3630) 2152.87,3597.15 ccw(c2145,3590.98) 2137.15,3597.17 cw(c2095,3630) 2083.13,3577.91 2082.05,3577.91 2077.91,3577.91 1835,3335 1835,3145.49 1850.49,3130 3032.55,3130 3043.5,3140.94 U1.16
DISP_RST: J3.8 U1.1 | length 591.3
  Top Layer 1 w10: J3.8 2888.78,3436.22 U1.1
DISP_SCK: J3.3 U1.44 | length 2119.2
  Top Layer 1 w10: U1.44 3628.61,2895.5 3628.61,2836.39 v1(3630,2835)
  Bottom Layer 1 w10: J3.3 2195,3165 2550,2810 3605,2810 v1(3630,2835)
DISP_TFT_CS: J3.5 U1.4 | length 915.8
  Top Layer 1 w10: J3.5 2420,3630 2452.93,3597.07 ccw(c2495,3630) 2462.07,3587.93 2672.83,3377.17 U1.4
DIST_ECHO: J1.3 U1.37 | length 536.3
  Top Layer 1 w10: U1.37 3490.32,2599.68 J1.3
DIST_TRIG: J1.2 U1.38 | length 428.1
  Top Layer 1 w10: U1.38 3510,2680 J1.2
FB3.3: R3.1 R4.2 U3.3 | length 199.5
  Top Layer 1 w10: R3.1 2455,1650 R4.2 2465,1660 2494.05,1660 2549.25,1715.2 U3.3
FB5: R5.1 R6.2 U4.3 | length 199.3
  Top Layer 1 w10: R5.1 R6.2 3130.25,1650.75 3150.65,1650.75 3207.5,1707.6 U4.3
GND: C1.1 C2.1 C3.2 C4.2 C5.2 C6.1 C7.2 C8.1 C9.1 C10.1 C11.1 C13.1 C14.1 C16.1 C17.1 C18.1 C20.1 C21.1 C22.1 J1.4 J2.2 J3.10 J4.1 J5.1 J6.1 J7.3 R2.2 R4.1 R6.1 S1.3 S1.4 S2.A1 S2.A2 U1.10 U1.19 U1.20 U1.26 U1.46 U1.47 U1.48 U1.50 U1.74 U1.99 U2.2 U3.2 U4.2 | length 4327.7
  Top Layer 1 w10: v1(3090,3090) 3090.49,3090 3098.6,3081.89 U1.19 ; v1(3110,3280) 3110,3279.51 3118.62,3270.89 3118.62,3266.13 3125.69,3259.06 U1.10 ; v1(3135,3040) 3157.2,3062.2 U1.20 ; v1(3220,2895) 3220.49,2895 3221.49,2896 U1.26 U1.26@3273.78,2919.5 ; U1.99 3293.46,3563.46 v1(3295,3565) ; v1(3605,2950) 3656.67,2950 3686.67,2920 3686.67,2896.5 U1.47 ; U1.46 3667.48,2827.52 v1(3685,2810) ; U1.48 3706.85,2843.15 3715,2835 v1(3770,2835) ; U1.50 3746.72,2896.5 3746.72,2900 3789.51,2900 3799.51,2910 v1(3800,2910) ; U1.74 3877.97,3416.54 3879.51,3415 v1(3880,3415) ; v1(3820,1855) 3821.91,1853.09 3844.62,1853.09 3845.79,1851.91 3859.33,1851.91 3901.22,1893.8 3901.22,1913.98 U2.2 ; v1(3910,1850) U2.2 ; v1(3910,3625) 3910,3682.09 S1.4 3968.71,3683.58 3972.29,3680 v1(3975,3680) ; v1(3930,1795) 3955.31,1820.31 3970.2,1820.31 3980.94,1831.06 R2.2 ; v1(3985,3450) 3985.35,3449.65 4002.31,3449.65 4040,3411.97 C1.1 4040,3462.29 4050,3472.29 v1(4050,3475) ; v1(4000,1785) 3980,1805 3980,1834.06 R2.2 ; v1(4025,2805) 4047.76,2827.76 4047.76,2888.46 S2.A1 4065,2897.24 4082.24,2880 4082.24,2820.46 4095,2807.71 v1(4095,2805) ; v1(4160,3685) 4220.08,3685 S1.3 4220,3682.09 v1(4220,3630) ; v1(4165,2805) 4165,2869.92 S2.A2@4170,2874.92 ; S2.A2 4165,2879.92 S2.A2@4170,2874.92 ; C2.1@4194.8,3333.03 4217.36,3310.47 4217.36,3270.34 4225,3262.71 v1(4225,3260) ; v1(4210,3400) 4210,3350.2 C2.1 v1(4255,3335) ; v1(4235,2805) 4233.09,2806.91 4233.09,2811.83 S2.A2@4170,2874.92 ; U2.2 3918.78,1913.98 3918.78,1893.8 3932.58,1880 3970,1880 3980.94,1869.06 R2.2
  Bottom Layer 1 w10: v1(3285,3390) 3285,3342.4 3302.4,3325 v1(3350,3325) ; v1(3360,3250) 3305,3250 C6.1 3290,3266.97 3312.56,3289.53 3409.98,3289.53 3414.51,3285 v1(3415,3285) ; C9.1@3403.09,3135.26 C9.1@3412.36,3144.53 ; v1(3410,3435) 3410,3504.8 C7.2 3432.36,3482.44 3432.36,3457.64 3470,3420 v1(3485,3420) ; C3.2 v1(3415,2975) ; C3.2@3415,2901.97 3462.69,2949.65 3479.65,2949.65 v1(3480,2950) ; v1(3430,3215) 3404.08,3189.08 3404.08,3134.27 C9.1 3389.8,3121.97 C9.1@3412.36,3144.53 ; v1(3450,3085) 3449.65,3084.65 3434.46,3084.65 3414.33,3064.53 3412.36,3064.53 3389.8,3041.97 C8.1 3404.8,3025 v1(3485,3025) ; v1(3460,3325) 3460,3325.49 3457.36,3328.13 3457.36,3362.44 C13.1 3490,3385 v1(3510,3365) ; v1(3465,3155) 3464.51,3155 3454.04,3144.53 C9.1@3412.36,3144.53 ; v1(3540,3080) 3540.49,3080 3550.49,3070 C14.1 3610,3120 v1(3595,3135) ; v1(3560,3430) 3607.64,3477.64 3607.64,3482.44 C5.2 3652.76,3482.44 3652.76,3439.32 3653.09,3438.98 3653.09,3431.91 v1(3655,3430) ; v1(3570,3365) 3570.48,3365 3580.48,3355 3610.2,3355 v1(3610.2,3300) ; v1(3670,3095) 3734.8,3095 C4.2 ; v1(3685,3165) 3686.91,3163.09 3686.91,3142.89 3710.47,3119.33 3710.47,3117.36 3733.03,3094.8 C4.2 ; v1(3755,3165) 3755,3164.51 3759.53,3159.98 3759.53,3117.36 3736.97,3094.8 C4.2
  other v1: 3010,1555 3085,1555 3165,1555 3240,1555 3315,1555 3385,1555 3465,1555 3535,1555 2360,1560 2430,1560 2505,1560 2580,1560 2650,1560 2730,1560 2810,1560 2880,1560 2580,1630 2650,1630 3240,1630 3315,1630 2995,1720 3050,1720 2335,1730 2390,1730 3105,1745 3165,1745 2440,1755 2495,1755 2995,1795 3050,1795 2335,1805 2390,1805
NetC1_2: C1.2 S2.B1 U1.94 | length 1007.3
  Top Layer 1 w10: U1.94 3392.39,3503.5 3392.39,3470.48 3400.74,3462.13 3882.87,3462.13 4047.76,3297.24 4047.76,3261.54 S2.B1 4065,3358.23 4114.8,3408.03 C1.2
NetC13_2: C13.2 U1.98 | length 150.1
  Top Layer 1 w10: U1.98 3313.15,3461.85 3326.17,3448.83 3346.17,3448.83 v2(3350,3445)
  Bottom Layer 1 w10: v2(3350,3445) 3350,3395 C13.2
NetC14_2: C14.2 U1.49 | length 246.1
  Top Layer 1 w10: v2(3678.28,2977.45) 3678.28,2977.27 3726.04,2929.52 3726.04,2896.5 U1.49
  Bottom Layer 1 w10: v2(3545,3005) 3545.49,3005 3555.29,2995.2 3655.13,2995.2 3672.87,2977.45 v2(3678.28,2977.45)
NetC23_1: C23.1 U1.12 | length 1398.5
  Top Layer 1 w10: C23.1 1920.39,3366.22 1941.35,3387.17 1941.35,3389.2 1954.39,3402.24 2616.2,3402.24 2823.44,3195 3148.89,3195 3164.13,3210.24 3164.13,3210.83 3172.48,3219.19 3205.5,3219.19 U1.12
NetC23_2: C23.2 Y1.2 | length 186.3
  Top Layer 1 w10: C23.2 2047.99,3330 Y1.2 Y1.2@2046.77,3371.22
NetC24_1: C24.1 U1.13 | length 667.5
  Top Layer 1 w10: C24.1@2614.47,3303.61 2613.48,3302.62 2613.48,3278.51 2711.99,3180 3153.57,3180 3164.13,3190.55 3164.13,3191.15 3172.48,3199.5 3205.5,3199.5 U1.13
NetC24_2: C24.2 Y1.1 | length 198.4
  Top Layer 1 w10: Y1.1 2458.23,3366.22 2484.14,3366.22 2490,3360.36 2608.44,3360.36 2614.3,3354.5 C24.2
NetR1_1: R1.1 R2.1 U2.3 | length 255.6
  Top Layer 1 w10: U2.3 3947.4,1910.94 3956.18,1902.17 3976.77,1902.17 4040,1838.94 R2.1 4040,1760 R1.1
NRST: C2.2 J7.5 S1.1 U1.14 | length 3139.8
  Top Layer 1 w10: J7.5 2275,2835 2800,2835 v1(2915,2950) ; v1(2915,3155) 2935,3155 2940,3160 3152.66,3160 3172.48,3179.82 3205.5,3179.82 U1.14 ; U1.14@3206.5,3180.82 3239.52,3180.82 3250.14,3191.44 3250.14,3724.14 3256,3730 3992.99,3730 S1.1@4216.57,3506.42 ; C2.2@4135,3330 4135,3351.97 4142.56,3359.53 4148.51,3359.53 4154.37,3365.39 4154.37,3374.27 4155.24,3375.14 4155.24,3445.08 S1.1@4216.57,3506.42 ; S1.1 S1.1@4216.57,3506.42
  Bottom Layer 1 w10: v1(2915,2950) v1(2915,3155)
PWR_SCL: R8.2 U1.52 U2.5 | length 1083.9
  Top Layer 1 w10: R8.2 3813.94,2045 3841.69,2017.24 U2.5 3870,2019.84 v1(3870,2140) ; U1.52 3814.5,2982.96 3847.52,2982.96 3870,2960.49 3870,2805 v1(3870,2715)
  Bottom Layer 1 w10: v1(3870,2140) v1(3870,2715)
PWR_SDA: R7.2 U1.53 U2.4 | length 1125.9
  Top Layer 1 w10: U1.53 3814.5,3002.65 3847.52,3002.65 3900,2950.17 3900,2760 v1(3900.18,2759.82) ; v1(3900,2185) 3900,2076.46 U2.4@3947.4,2029.06 ; U2.4@3956.18,2026.02 U2.4 U2.4@3947.4,2028.76 ; R7.2 3991.89,2037.83 3956.18,2037.83 U2.4@3947.4,2029.06 ; U2.4@3947.4,2028.76 U2.4@3947.4,2029.06 ; U2.4@3947.4,2028.76 U2.4@3947.4,2029.06
  Bottom Layer 1 w10: v1(3900,2185) 3900.09,2185.09 3900.09,2759.73 v1(3900.18,2759.82)
SW3.3: C19.1 L2.1 U3.6 | length 308.3
  Top Layer 1 w10: C19.1 2560.58,1885 2602.78,1842.8 2723.78,1842.8 L2.1
SW5: C15.1 L1.1 U4.6 | length 319.8
  Top Layer 1 w10: C15.1@3120,1875 3215.28,1875 3225.58,1864.7 3225.58,1864.42 3252.2,1837.8 3392.8,1837.8 L1.1@3415,1860
V_IN: C16.2 C17.2 C20.2 C21.2 J5.2 R1.2 U3.4 U3.5 U4.4 U4.5 | length 367.4
  Top Layer 1 w10: U3.4 2769.33,1715.2 C21.2@2775,1709.53 ; U4.4 3427.4,1707.6 C17.2 ; v2(3900.94,1670) 3902.86,1671.91 3922.86,1671.91 3950.94,1700 3950.94,1726.06 3947.01,1730 v2(3900.94,1730)
  other v2: 3380,1745 3485,1745 3555,1750 2710,1755 2805,1755 2865,1755
WIFI_CS: J2.6 U1.64 | length 1357.6
  Top Layer 1 w10: U1.64 3895.32,3219.68 3930,3185 3930,2375 J2.6
WIFI_EN: J2.7 U1.65 | length 1277.4
  Top Layer 1 w10: U1.65 3895.63,3239.37 3945,3190 3945,2460 J2.7
WIFI_IRQ: J2.8 U1.68 | length 1213.6
  Top Layer 1 w10: U1.68 3814.5,3297.93 3857.07,3297.93 3960,3195 3960,2545 J2.8
WIFI_MISO: J2.4 U1.30 | length 1559.7
  Top Layer 1 w10: U1.30 3352.52,2549.1 3651.62,2250 3945,2250 4179.74,2015.26 4179.74,2011.12 4179.74,2008.38 ccw(c4225,1980) 4219.67,1926.84 4222.07,1924.44 4225,1921.51 J2.4
WIFI_MOSI: J2.5 U1.31 | length 1444.6
  Top Layer 1 w10: U1.31 3372.2,2548.5 3654.53,2266.18 3953.82,2266.18 4225,1995 J2.5
WIFI_RST: J2.9 U1.69 | length 1133
  Top Layer 1 w10: U1.69 3814.5,3317.61 3856.64,3317.61 3975,3199.25 3975,2630 J2.9
WIFI_SCK: J2.3 U1.29 | length 1662.4
  Top Layer 1 w10: U1.29 3332.83,2549.69 3647.53,2235 3935,2235 4161.9,2008.1 4161.9,2003.96 4161.9,2002.3 ccw(c4225,1980) 4182.57,1928.24 cw(c4176.21,1920.53) 4183.93,1914.17 ccw(c4225,1880) 4205.03,1830.45 4206.41,1829.07 4209.34,1826.14 4209.34,1812.13 4225,1796.47 J2.3
WIFI_WAKE: J2.10 U1.70 | length 1052.4
  Top Layer 1 w10: U1.70 3814.5,3337.3 3856.05,3337.3 3990,3203.35 3990,2715 J2.10
pads on no net: U1.5 U1.7 U1.8 U1.9 U1.15 U1.18 U1.22 U1.24 U1.25 U1.28 U1.32 U1.33 U1.34 U1.35 U1.36 U1.39 U1.40 U1.41 U1.42 U1.43 U1.45 U1.54 U1.55 U1.56 U1.57 U1.58 U1.59 U1.60 U1.61 U1.62 U1.63 U1.66 U1.67 U1.71 U1.77 U1.78 U1.79 U1.80 U1.81 U1.82 U1.83 U1.84 U1.85 U1.86 U1.87 U1.88 U1.90 U1.91 U1.92 U1.93 U1.95 U1.96 U1.97

## Polygon pours and split planes (outlines as drawn)
GND on Top Layer 1 "NONET_L04_P013" (solid, pour order 3): 3247.13,1785.03 3247.16,1785 3289.5,1785 3289.5,1680 3354.5,1680 3354.5,1640 3579.5,1640 3579.5,1520 2964.5,1520 2964.5,1610 3189.5,1610 3189.5,1615 3189.5,1680 3244.5,1680 3249.5,1685 3249.5,1725 3159.5,1725 3159.5,1670 2964.5,1670 2964.5,1875 3079.5,1875 3079.5,1765 3249.5,1765 3249.5,1785
GND on Top Layer 1 "NONET_L04_P013" (solid, pour order 12): 1755,3770 4320,3770 4320,1485 1755,1485
V_IN on Top Layer 1 "NONET_L04_P013" (solid, pour order 2): 3305.16,1760.53 3578.97,1760.53 3579.5,1760 3579.5,1700 3394.5,1700 3364.5,1730 3304.5,1730
3.3V on Top Layer 1 "NONET_L04_P013" (solid, pour order 8): 2320,1940 2915,1940 2915,2245 2320,2245
SW5 on Top Layer 1 "NONET_L04_P013" (solid, pour order 0): 3304.5,1770 3454.5,1770 3454.5,1875 3304.5,1875
5V on Top Layer 1 "NONET_L04_P013" (solid, pour order 4): 2969.09,1930 3575,1930 3575,2225 2969.09,2225
V_IN on Top Layer 1 "NONET_L04_P013" (solid, pour order 6): 2645.76,1770 2915,1770 2925,1760 2925,1705 2735,1705 2705,1735 2645,1735
GND on Top Layer 1 "NONET_L04_P013" (solid, pour order 5): 2587.63,1795.03 2587.66,1795 2630,1795 2630,1690 2695,1690 2695,1650 2920,1650 2920,1520 2305,1520 2305,1620 2530,1620 2530,1625 2530,1690 2585,1690 2590,1695 2590,1735 2500,1735 2500,1680 2305,1680 2305,1885 2420,1885 2420,1775 2590,1775 2590,1795
SW3.3 on Top Layer 1 "NONET_L04_P013" (solid, pour order 7): 2645,1780 2795,1780 2795,1885 2645,1885
GND on Bottom Layer 1 "NONET_L04_P013" (solid, pour order 13): 1750,3780 4325,3780 4330,3775 4330,1475 1750,1475 1745,1480
5V on POWER (split plane): 3984.9,1885.1 2965.1,1885.1 2965.1,2699.9 3984.9,2699.9
V_IN on POWER (split plane): 3924.9,1515.1 1785.1,1515.1 1785.1,1774.9 3924.9,1774.9
3.3V on POWER (split plane): 1775.29,1508.05 1776.4,1506.4 1778.05,1505.29 1779.02,1505.1 1775.1,1505.1 1775.1,1509.02
3.3V on POWER (split plane): 4299.9,1505.1 3930.98,1505.1 3931.95,1505.29 3933.6,1506.4 3934.71,1508.05 3935.1,1510 3935.1,1780 3934.71,1781.95 3933.6,1783.6 3931.95,1784.71 3930,1785.1 1780,1785.1 1778.05,1784.71 1776.4,1783.6 1775.29,1781.95 1775.1,1780.98 1775.1,3749.9 4299.9,3749.9
GND on GND (split plane): 4299.9,1505.1 1775.1,1505.1 1775.1,3749.9 4299.9,3749.9

## Other copper
POWER (plane layer: these items are gaps in the copper):
  lines w10: 1780,1510 3930,1510 3930,1780 1780,1780 1780,1510 ; 2960,1880 3990,1880 3990,2705 2960,2705 2960,1880

## Silkscreen, mask and mechanical layers (free items; w line width, h text height)
Top Overlay:
  text "Sensor V2" at 2315,2355 h60
Mechanical 1:
  lines w10: 1785,1515 3135,1515 3135,3735 1785,3735 1785,1515 ; 3190,1515 4290,1515 4290,2815 3190,2815 3190,1515
Top Assembly:
  lines w10: 1755,3765 1755,1485 4320,1485 4320,3770 1755,3770

## Dimensions
1775,1500 to 1755,3780 on Mechanical 1
1755,3765 to 4320,3770 on Mechanical 1

## Text inside footprints (layer, text, board x,y; h text height)
U1: Top 3D Body "*" at 3139.5,3436.06 h40; Top Overlay "*" at 3139.5,3436.06 h40
U3: Top 3D Body "*" at 2579.25,1759.6 h40; Top Overlay "*" at 2535,1807 h40
U4: Top 3D Body "*" at 3237.5,1752 h40; Top Overlay "*" at 3193.25,1799.4 h40